# EAGLE board EagleXml_ForCircuitStacks-masteroutput (EAGLE 7.3.0)

Size 31.78 x 169.42 mm. Coordinates in mm from the lower left corner, seen from the top.
Outline: 0,0 31.78,0 31.78,169.42 0,169.42 0,0
Copper layers (1*16): Top 0.035mm / dielectric 1.5mm / Bottom 0.035mm
Design rules "default": minimum track width 10mil, minimum drill 24mil, track to track 8mil, track to pad 8mil, pad to pad 8mil, via to via 8mil, smd to smd 8mil, copper to edge 40mil, drill to drill 8mil, minimum pad ring 10mil, minimum via ring 8mil, stop-mask expansion 4mil, vias tented up to drill 0mil, thermal gap 10mil

## Footprints (pad centres in the part's own frame; a part is rotated, then mirrored left to right if it is on the bottom)
1X01 = drill 1.016 pad 1.88: 1 0,0

## Placement (x,y rotation side)
LS0  [1X01]  13.99,157.83 0 top
LS1  [1X01]  13.99,155.29 0 top
LS2  [1X01]  13.99,144.5 0 top
LS3  [1X01]  13.99,141.96 0 top
LS4  [1X01]  13.99,131.17 0 top
LS5  [1X01]  13.99,128.63 0 top
LS6  [1X01]  13.99,117.84 0 top
LS7  [1X01]  13.99,115.3 0 top
LS8  [1X01]  13.99,104.51 0 top
LS9  [1X01]  13.99,101.97 0 top
LS10  [1X01]  13.99,91.18 0 top
LS11  [1X01]  13.99,88.64 0 top
LS12  [1X01]  13.99,77.85 0 top
LS13  [1X01]  13.99,75.31 0 top
LS14  [1X01]  13.99,64.52 0 top
LS15  [1X01]  13.99,61.98 0 top
LS16  [1X01]  13.99,51.19 0 top
LS17  [1X01]  13.99,48.65 0 top
LS18  [1X01]  13.99,37.86 0 top
LS19  [1X01]  13.99,35.32 0 top
LS20  [1X01]  13.99,24.53 0 top
LS21  [1X01]  13.99,21.99 0 top
LS22  [1X01]  13.99,11.2 0 top
LS23  [1X01]  13.99,8.66 0 top
RL26  [1X01]  24.78,97.98 0 top
RS0  [1X01]  17.8,157.83 0 top
RS1  [1X01]  17.8,155.29 0 top
RS2  [1X01]  17.8,144.5 0 top
RS3  [1X01]  17.8,141.96 0 top
RS4  [1X01]  17.8,131.17 0 top
RS5  [1X01]  17.8,128.63 0 top
RS6  [1X01]  17.8,117.84 0 top
RS7  [1X01]  17.8,115.3 0 top
RS8  [1X01]  17.8,104.51 0 top
RS9  [1X01]  17.8,101.97 0 top
RS10  [1X01]  17.8,91.18 0 top
RS11  [1X01]  17.8,88.64 0 top
RS12  [1X01]  17.8,77.85 0 top
RS13  [1X01]  17.8,75.31 0 top
RS14  [1X01]  17.8,64.52 0 top
RS15  [1X01]  17.8,61.98 0 top
RS16  [1X01]  17.8,51.19 0 top
RS17  [1X01]  17.8,48.65 0 top
RS18  [1X01]  17.8,37.86 0 top
RS19  [1X01]  17.8,35.32 0 top
RS20  [1X01]  17.8,24.53 0 top
RS21  [1X01]  17.8,21.99 0 top
RS22  [1X01]  17.8,11.2 0 top
RS23  [1X01]  17.8,8.66 0 top

## Library data of the parts
LS0 LS1-LS23 RL26 RS0 RS1-RS23 = SparkFun-Connectors

## Nets
signal0: LS11.1 RS11.1
signal1: RL26.1 RS9.1

## Tracks (layer width: path | path; a pad name or v marks a point on that pad's centre or on a via)
signal0  (1 unrouted)
signal1  (1 unrouted)